# Altium PCB v3.PcbDoc
Units mm, origin at the board's own origin, x right, y up, seen from the top; angles counter-clockwise.
Board outline 28.92 x 23.03 mm, 2 copper layers (Top Layer, Bottom Layer); 6 components, 7 nets, 28 pads, 0 vias.
Unrouted connection lines stored in the file: 1.
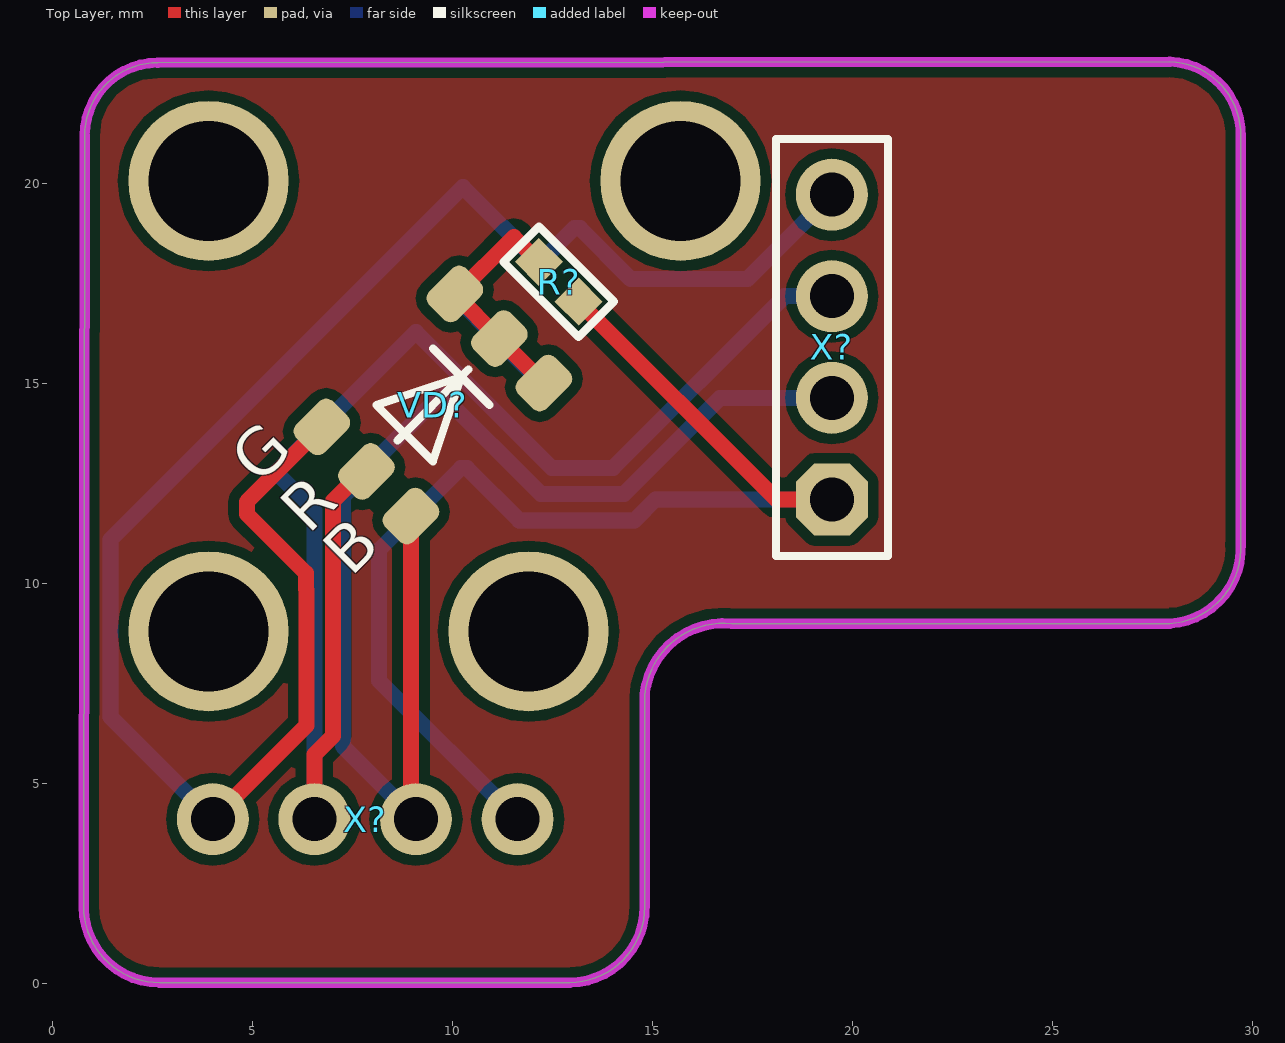
[diagram p0: Top Layer view]
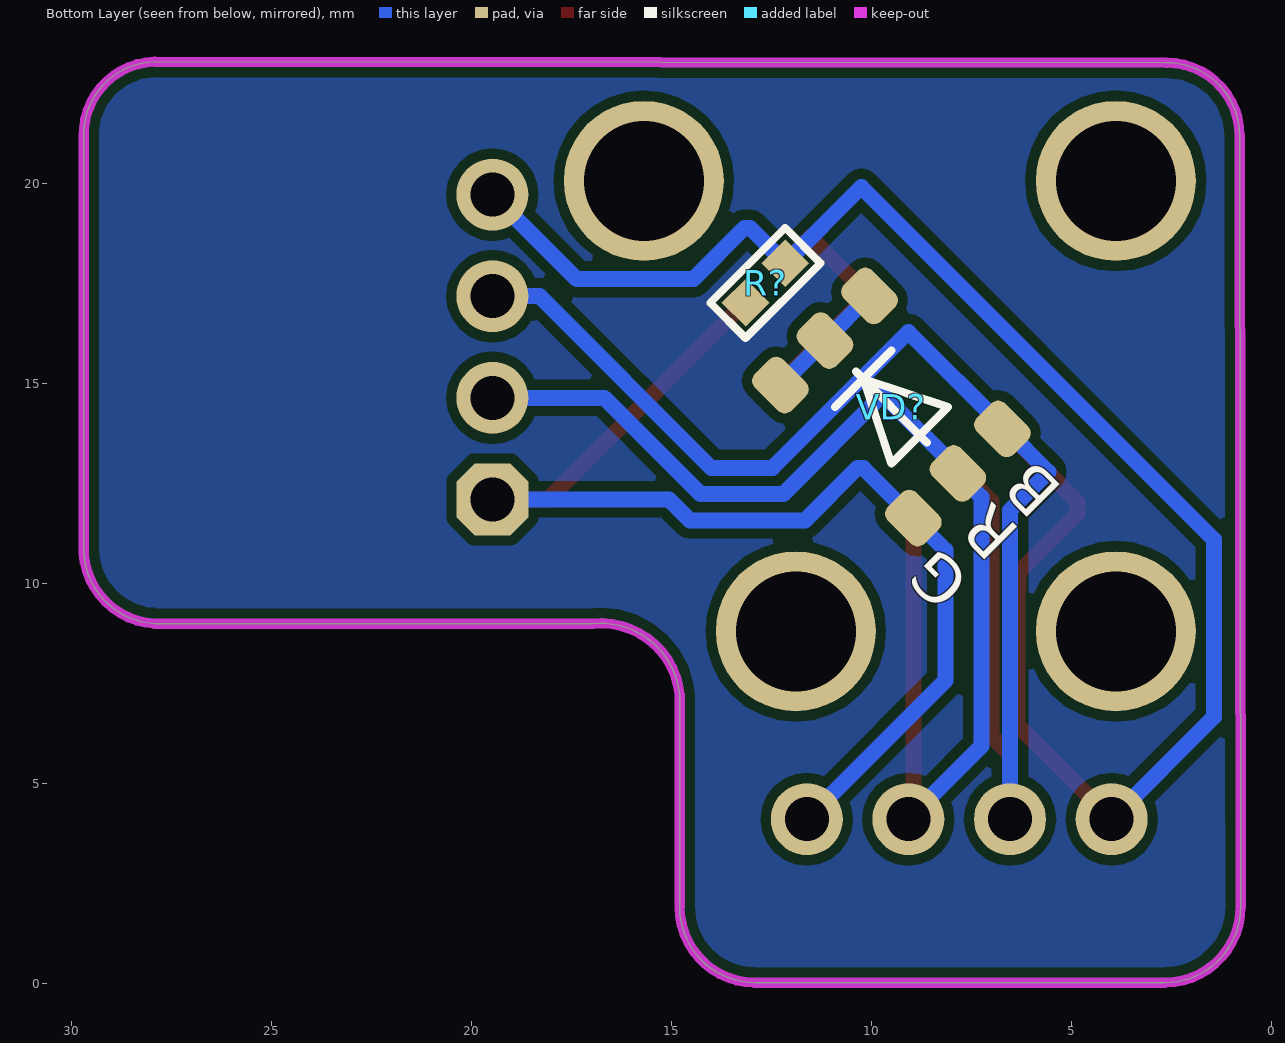
[diagram p1: Bottom Layer view, seen from below]

## Layer stack, top to bottom
Top Solder: solder mask 0.0102, Solder Resist, Dk 3.5
Top Layer: signal copper 0.0356
Dielectric 1: dielectric 0.32, FR-4, Dk 4.8
Bottom Layer: signal copper 0.0356
Bottom Solder: solder mask 0.0102, Solder Resist, Dk 3.5

## Board outline
0.769,1.933 ccw(c2.669,1.933) 2.669,0.033 12.919,0.033 ccw(c12.906,1.92) 14.794,1.933 14.794,7.233 cw(c16.769,7.033) 16.969,9.008 27.919,9.008 ccw(c27.806,10.896) 29.694,11.008 29.694,21.183 ccw(c27.869,21.233) 27.919,23.058 2.619,23.033 ccw(c2.619,21.208) 0.794,21.208

## Design rules (kind name [scope] priority, off if disabled: settings)
Clearance [All] p1: gap=0.254 ignorepadtopadclearanceinfootprint=FALSE except(0: Arc-Hole Track-Hole SMDPad-Hole THPad-Hole Via-Hole Fill-Hole Poly-Hole Region-Hole Text-Hole)
PolygonConnect [All] p1: connectstyle=Relief reliefconductorwidth=0.254 reliefentries=4 polygonreliefangle="90 Angle" airgapwidth=0.254
RoutingVias [All] p1: holewidth=0.711 width=1.27 viastyle="Through Hole" minholewidth=0.711 minwidth=1.27 maxholewidth=0.711 maxwidth=1.27
SolderMaskExpansion [All] p1: expansion=0.102
Width [All] p1: maxlimit=10 minlimit=0.254 preferedwidth=0.254 minimp=50.000000 maximp=50.000000 favimp=50.000000
30 further rules are at their usual default settings.

## Classes and differential pairs
component class pipe_corner_schematic: R? VD? X?

## Components (designator, comment, footprint, x,y, rotation, side; value= is the part's Value field where it differs from the comment)
R? "Resistor film, 100R, ±5%, 0603, 0.1W, -55...+125°C" "RES: 0603" 12.65,17.525 r315 bottom value=100R
R? "Resistor film, 100R, ±5%, 0603, 0.1W, -55...+125°C" "RES: 0603" 12.645,17.555 r315 top value=100R
VD? "VD?" RGB 9.5,14.425 r45 bottom
VD? "VD?" RGB 9.5,14.475 r45 top
X? "Connector, 4pin, 2.54mm, 500VAC, 3A" "4PLS RIGHT ANGLE 2" 7.806,4.12 r180 top
X? "Connector, 4pin, 2.54mm, 500VAC, 3A" "CON: PBS-4 R" 19.475,15.925 r90 top

## Footprints (in the part's own frame and the unit in brackets; to place one, negate y for a bottom-side part, rotate by r counter-clockwise, add the part's x,y. Pads: shape width x height; smd on the part's side, far side on the other; paste and mask are expansions set on the pad)
"4PLS RIGHT ANGLE 2" [mm]
  round 1.8 hole 1.1: 1(-3.81,0) 2(-1.27,0) 3(1.27,0) 4(3.81,0)
  body extent -5.04,-0.32 5.14,10.04, height 2.57
"CON: PBS-4 R" [mm] "PBS-5"
  oct 1.8x1.8 hole 1.1: 1(-3.81,0)
  round 1.8 hole 1.1: 2(-1.27,0) 3(1.27,0) 4(3.81,0)
  silkscreen extent -5.23,-1.4 5.2,1.4, body extent -5.08,-10.2 5.08,0, height 2.54
"RES: 0603" [mm]
  rect 0.85x0.85 smd: 1(-0.7,0) 2(0.7,0)
  silkscreen extent -1.33,-0.63 1.33,0.63, body extent -0.8,-0.4 0.8,0.4, height 0.44
RGB [mm]
  rrect50% 1.3x1 smd: 1(2.35,1.575) 2(2.35,0) 3(2.35,-1.575) 4(-2.35,1.575) 5(-2.35,0) 6(-2.35,-1.575)
  silkscreen extent -1.25,-1 1.25,1, body extent -1.8,-1.75 1.8,1.75, height 2.01

## Part data
R? R?: library part Resistor_0603, Manufacturer=Yageo, Package=0603, PartNumber=RC0603JR-07100RL, Power=0.1W, Temperature=-55...+125°C, Tolerance=±5%, TypeResistor="Resistor film", HelpURL=https://www.digikey.com/product-detail/en/yageo/RC0603JR-07100RL/311-100GRCT-ND/729644, ValueManufacturerPartNumber="Resistor film, 100R, ±5%, 0603, 0.1W, -55...+125°C"
VD? VD?: library part RGB
X?: library part PLS-4, CurrentMax=3A, Manufacturer=Connfly, VoltageMax=500VAC, CommentText=Input, HelpURL=https://www.chipdip.ru/product/pls-4, Multichannel=4pin, PartNumber=PLS-4, Pitch=2.54mm, TypeConnector=Connector, ValueManufacturerPartNumber="Connector, 4pin, 2.54mm, 500VAC, 3A"
X?: library part PBS-4, CurrentMax=3A, Manufacturer=Connfly, VoltageMax=500VAC, CommentText=Output, HelpURL=https://www.chipdip.ru/product/pbs-4, Multichannel=4pin, PartNumber=PBS-4, Pitch=2.54mm, TypeConnector=Connector, ValueManufacturerPartNumber="Connector, 4pin, 2.54mm, 500VAC, 3A"

## Free pads (board coordinates)
  round 4 hole 3: 2(3.89,8.818) 2(3.89,20.078) 2(11.89,8.818) 2(15.69,20.078)

## Nets (pads, with @x,y where several pads share a name; then routed paths per layer and width w, separated by ;. In a path a pad name is that pad's centre, name@x,y a point inside that pad or via, vN(x,y) a via of type N, cw(c..) or ccw(c..) an arc to the next point about the centre after c; other vN are vias at no path point)
GND: R?.2 VD?.4@8.952,11.65 X?.1 | length 29.5
  Top Layer w0.4: R?.2@13.14,17.06 18.085,12.115 X?.1@19.475,12.115
  Bottom Layer w0.4: X?.1@11.616,4.12 8.152,7.584 8.152,10.85 8.952,11.65 10.202,12.9 10.35,12.9 11.658,11.592 14.542,11.592 15.065,12.115 X?.1@19.475,12.115
NetR?_1: R?.1@12.15,18.05 VD?.1@10.048,17.25 VD?.2@11.162,16.137 VD?.3@12.275,15.023 | length 6.1
  Top Layer w0.4: R?.1@12.15,18.05 11.525,18.675 10.1,17.25 10.048,17.25 11.162,16.137 VD?.3@12.275,15.023
NetVD?_2: 
NetVD?_4: R?.1@12.155,18.02 VD?.4@6.725,13.927 X?.4 | length 44.5
  Top Layer w0.4: X?.4@3.996,4.12 6.344,6.468 6.344,9.854 6.325,9.873 6.325,10.275 4.85,11.75 4.85,12.052 VD?.4@6.725,13.927
  Bottom Layer w0.4: X?.4@3.996,4.12 1.436,6.68 1.436,11.111 10.25,19.925 12.155,18.02 13.035,18.9 13.175,18.9 14.451,17.624 17.364,17.624 X?.4@19.475,19.735
NetVD?_5: VD?.5@7.838,12.813 VD?.6@6.725,13.877 X?.3 | length 36.9
  Top Layer w0.4: X?.3@6.536,4.12 6.536,5.735 6.998,6.197 6.998,12.073 7.738,12.813 VD?.5@7.838,12.813
  Bottom Layer w0.4: X?.3@6.536,4.12 6.536,11.839 5.575,12.8 6.652,13.877 9.075,16.3 12.475,12.9 14,12.9 18.295,17.195 X?.3@19.475,17.195
NetVD?_6: VD?.5@7.838,12.763 VD?.6@8.952,11.7 X?.2 | length 31.8
  Top Layer w0.4: VD?.6@8.952,11.7 8.952,4.244 X?.2@9.076,4.12
  Bottom Layer w0.4: X?.2@9.076,4.12 7.25,5.946 7.25,12.175 7.838,12.763 7.838,12.863 9.713,14.738 12.204,12.246 14.271,12.246 16.68,14.655 X?.2@19.475,14.655
track: VD?.1@12.275,14.973 VD?.2@11.162,16.087 VD?.3@10.048,17.2 | length 3.2
  Bottom Layer w0.4: VD?.3@10.048,17.2 11.162,16.087 VD?.1@12.275,14.973

## Polygon pours and split planes (outlines as drawn)
no net on Top Layer "Top Layer-No Net" (solid, pour order 0): 0.769,1.933 ccw(c2.669,1.933) 2.669,0.033 12.919,0.033 ccw(c12.906,1.92) 14.794,1.933 14.794,7.233 cw(c16.769,7.033) 16.969,9.008 27.919,9.008 ccw(c27.806,10.896) 29.694,11.008 29.694,21.183 ccw(c27.869,21.233) 27.919,23.058 2.619,23.033 ccw(c2.619,21.208) 0.794,21.208
no net on Bottom Layer "Top Layer-No Net1" (solid, pour order 1): 0.769,1.933 ccw(c2.669,1.933) 2.669,0.033 12.919,0.033 ccw(c12.906,1.92) 14.794,1.933 14.794,7.233 cw(c16.769,7.033) 16.969,9.008 27.919,9.008 ccw(c27.806,10.896) 29.694,11.008 29.694,21.183 ccw(c27.869,21.233) 27.919,23.058 2.619,23.033 ccw(c2.619,21.208) 0.794,21.208

## Keep-outs
Keep-Out Layer:
  the board outline again, w0.254

## Text inside footprints (layer, text, board x,y; h text height)
VD?: Top Overlay "B" at 7.732,9.879 h2 r45; Top Overlay "R" at 6.672,10.939 h2 r45; Top Overlay "G" at 5.434,12.177 h2 r45
VD?: Bottom Overlay "B" at 4.904,12.657 h2 r225; Bottom Overlay "R" at 5.964,11.597 h2 r225; Bottom Overlay "G" at 7.202,10.359 h2 r225